# EAGLE board miniledcube (EAGLE 5.11)
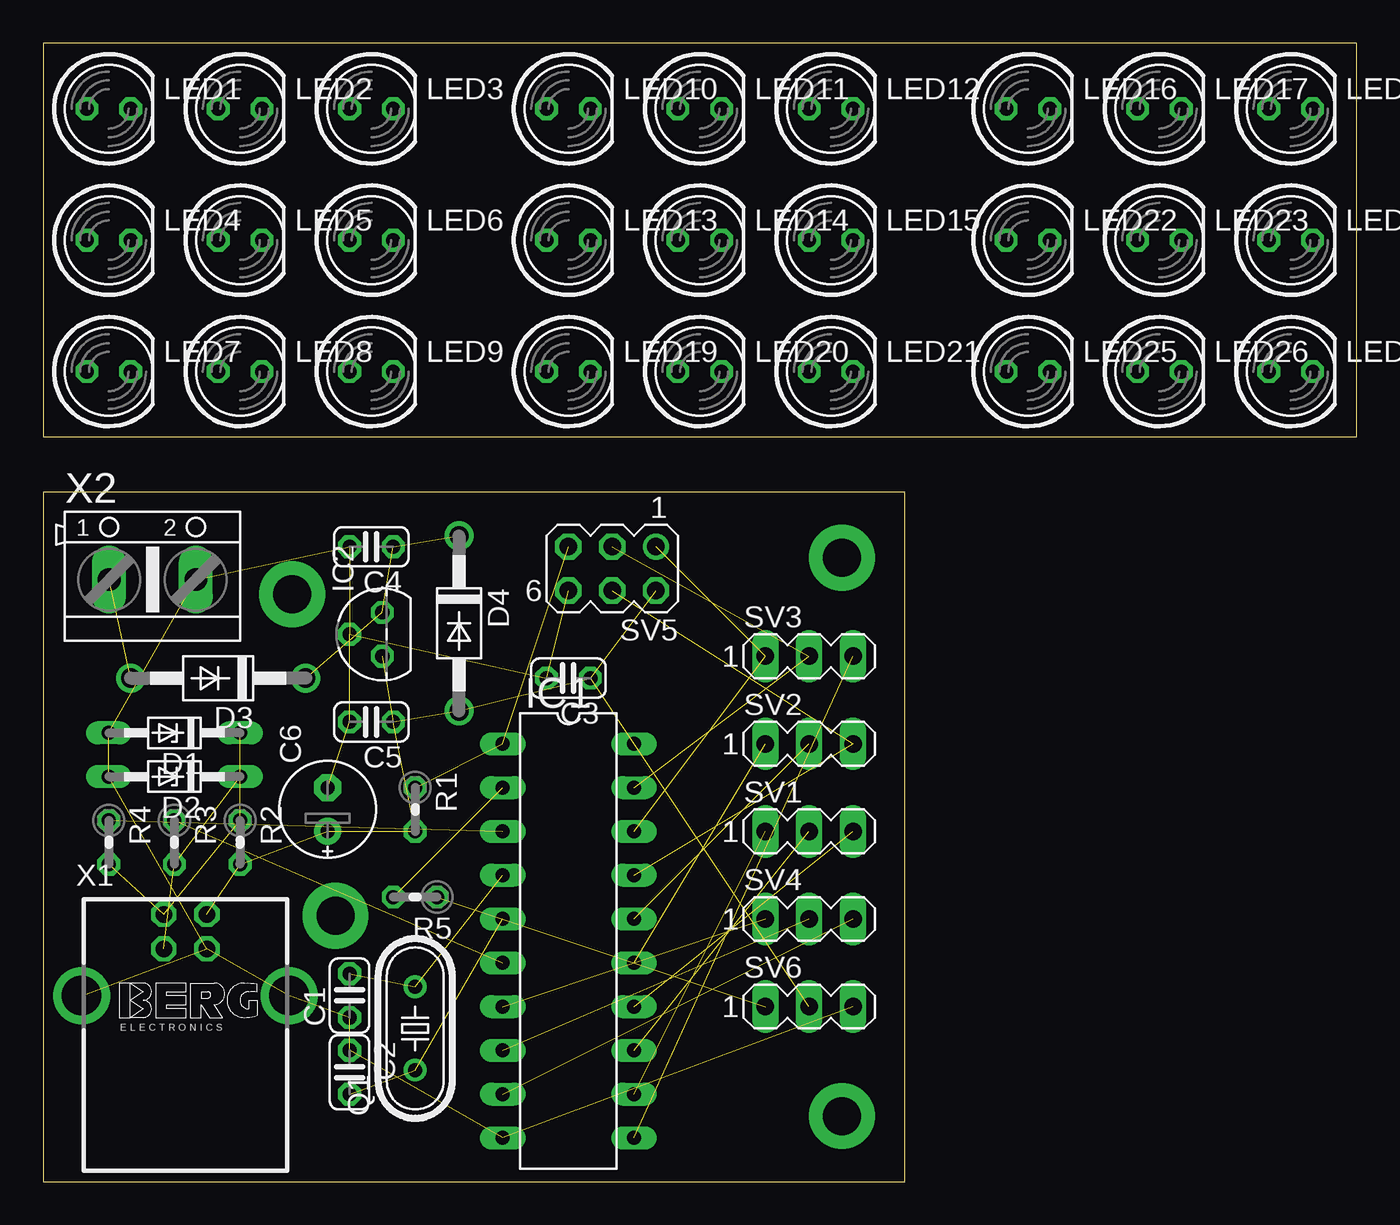
[diagram p0: board, top side]
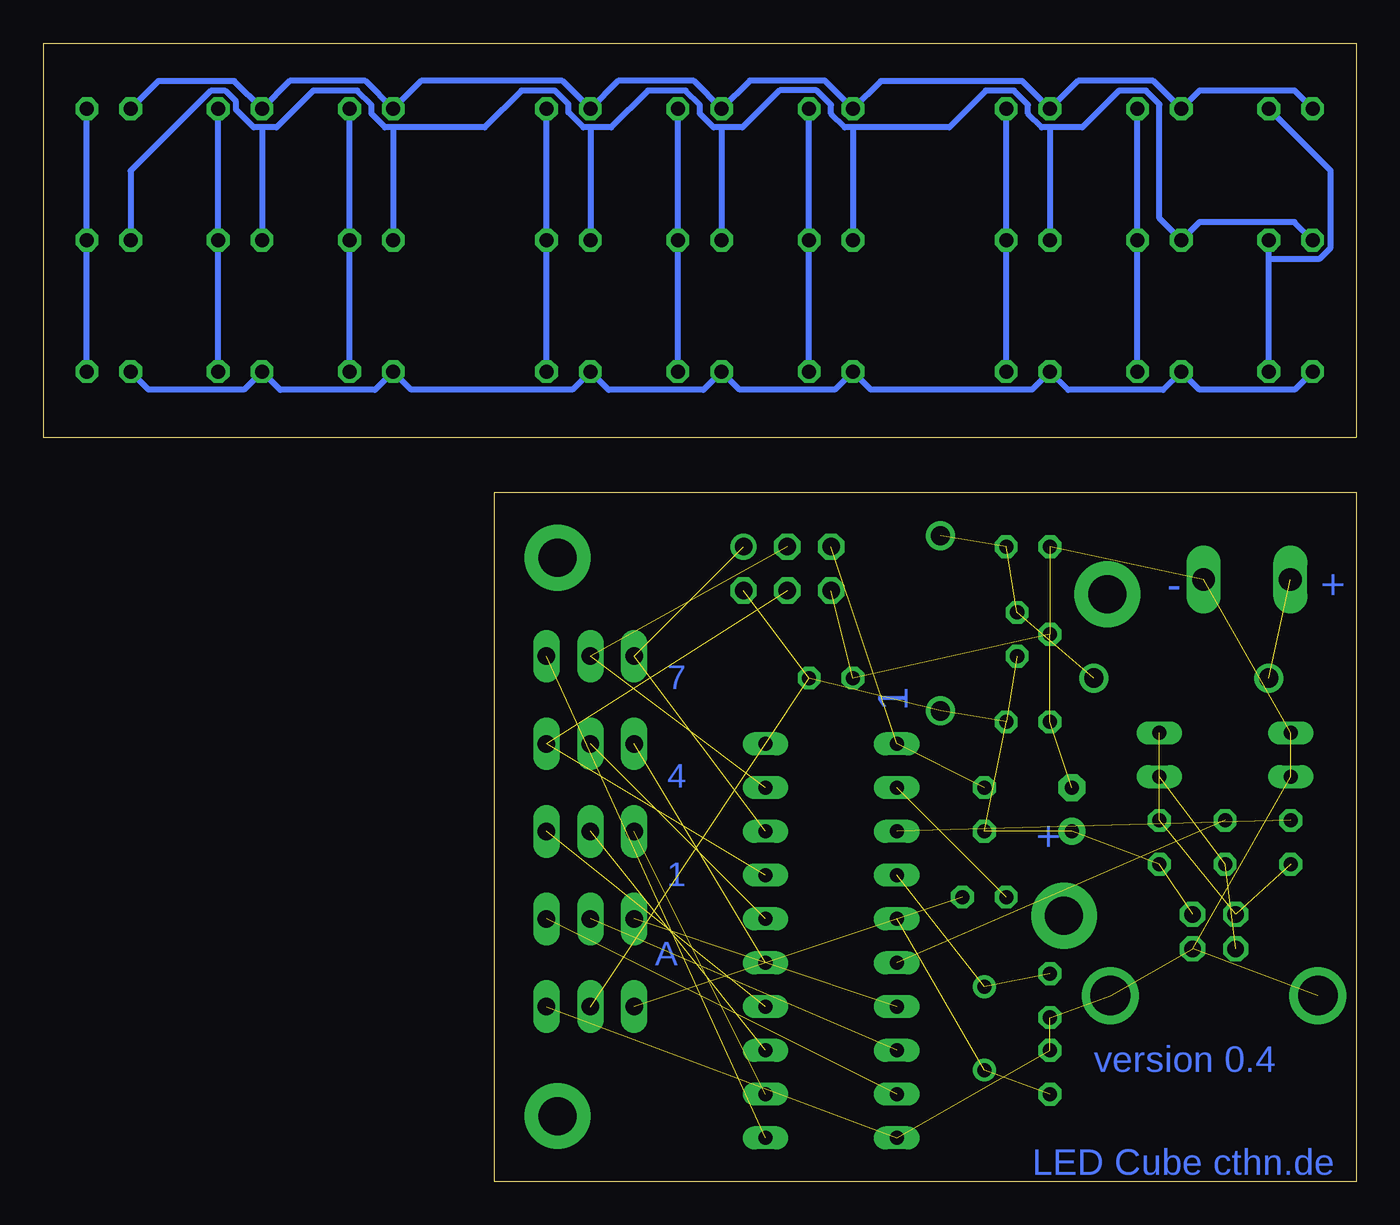
[diagram p1: board, bottom side, seen from below]

Size 76.2 x 66.04 mm. Coordinates in mm from the lower left corner, seen from the top.
Outline: 0,0 50,0 50,40 0,40 0,0
Outline: 76.2,66.04 0,66.04 0,43.18 76.2,43.18 76.2,66.04
Copper layers (1*16): Top 0.035mm / dielectric 1.5mm / Bottom 0.035mm
Design rules "default *": minimum track width 14mil, minimum drill 24mil, track to track 8mil, track to pad 8mil, pad to pad 8mil, via to via 8mil, smd to smd 8mil, copper to edge 40mil, drill to drill 8mil, minimum pad ring 10mil, minimum via ring 8mil, stop-mask expansion 4mil, vias tented up to drill 0mil, thermal gap 10mil

## Footprints (pad centres in the part's own frame; a part is rotated, then mirrored left to right if it is on the bottom)
C025-024X044 = drill 0.813 octagon: 1 -1.27,0; 2 1.27,0
E2,5-6E = drill 0.813 pad 1.575 round: + -1.27,0 | drill 0.813 pad 1.575 octagon: - 1.27,0
DO34Z7 = drill 0.813 long: A 3.81,0; C -3.81,0
DO41-10 = drill 1.118 round: A 5.08,0; C -5.08,0
DIL20 = drill 0.813 long: 1 -11.43,-3.81; 2 -8.89,-3.81; 3 -6.35,-3.81; 4 -3.81,-3.81; 5 -1.27,-3.81; 6 1.27,-3.81; 7 3.81,-3.81; 8 6.35,-3.81; 9 8.89,-3.81; 10 11.43,-3.81; 11 11.43,3.81; 12 8.89,3.81; 13 6.35,3.81; 14 3.81,3.81; 15 1.27,3.81; 16 -1.27,3.81; 17 -3.81,3.81; 18 -6.35,3.81; 19 -8.89,3.81; 20 -11.43,3.81
TO92 = drill 0.813 octagon: 1 -1.27,0; 2 0,1.905; 3 1.27,0
LED5MM = drill 0.813 octagon: A -1.27,0; K 1.27,0
HC49/S = drill 0.813 round: 1 -2.413,0; 2 2.413,0
0204V = drill 0.813 octagon: 1 -1.27,0; 2 1.27,0
MA03-1 = drill 1.016 long: 1 -2.54,0; 2 0,0; 3 2.54,0
MA03-2 = drill 1.016 round: 1 -2.54,-1.27 | drill 1.016 octagon: 2 -2.54,1.27; 3 0,-1.27; 4 0,1.27; 5 2.54,-1.27; 6 2.54,1.27
PN61729-S = drill 0.95 octagon: 1 1.25,4.71; 2 -1.25,4.71; 3 -1.25,2.71; 4 1.25,2.71 | drill 2.3 pad 2.9 round: S1 -6.02,0; S2 6.02,0
AK500/2 = drill 1.321 long: 1 -2.515,0; 2 2.515,0

## Placement (x,y rotation side)
C1  27p  [C025-024X044]  17.78,10.79 90 top
C2  27p  [C025-024X044]  17.78,6.35 270 top
C3  100n  [C025-024X044]  30.48,29.21 180 top
C4  100n  [C025-024X044]  19.05,36.83 180 top
C5  100n  [C025-024X044]  19.05,26.67 180 top
C6  4µ7  [E2,5-6E]  16.51,21.59 90 top
D1  3V6  [DO34Z7]  7.62,26.04 180 top
D2  3V6  [DO34Z7]  7.62,23.5 180 top
D3  1n4148  [DO41-10]  10.16,29.21 180 top
D4  1n4148  [DO41-10]  24.13,32.38 270 top
IC1  ATTINY2313V-10P  [DIL20]  30.48,13.97 270 top
IC2  78L05  [TO92]  19.68,31.75 90 top
LED1  [LED5MM]  3.81,62.23 0 top
LED2  [LED5MM]  11.43,62.23 0 top
LED3  [LED5MM]  19.05,62.23 0 top
LED4  [LED5MM]  3.81,54.61 0 top
LED5  [LED5MM]  11.43,54.61 0 top
LED6  [LED5MM]  19.05,54.61 0 top
LED7  [LED5MM]  3.81,46.99 0 top
LED8  [LED5MM]  11.43,46.99 0 top
LED9  [LED5MM]  19.05,46.99 0 top
LED10  [LED5MM]  30.48,62.23 0 top
LED11  [LED5MM]  38.1,62.23 0 top
LED12  [LED5MM]  45.72,62.23 0 top
LED13  [LED5MM]  30.48,54.61 0 top
LED14  [LED5MM]  38.1,54.61 0 top
LED15  [LED5MM]  45.72,54.61 0 top
LED16  [LED5MM]  57.15,62.23 0 top
LED17  [LED5MM]  64.77,62.23 0 top
LED18  [LED5MM]  72.39,62.23 0 top
LED19  [LED5MM]  30.48,46.99 0 top
LED20  [LED5MM]  38.1,46.99 0 top
LED21  [LED5MM]  45.72,46.99 0 top
LED22  [LED5MM]  57.15,54.61 0 top
LED23  [LED5MM]  64.77,54.61 0 top
LED24  [LED5MM]  72.39,54.61 0 top
LED25  [LED5MM]  57.15,46.99 0 top
LED26  [LED5MM]  64.77,46.99 0 top
LED27  [LED5MM]  72.39,46.99 0 top
Q1  [HC49/S]  21.59,8.89 90 top
R1  10k  [0204V]  21.59,21.59 270 top
R2  1k5  [0204V]  11.43,19.68 270 top
R3  69  [0204V]  7.62,19.68 270 top
R4  69  [0204V]  3.81,19.68 270 top
R5  1M5  [0204V]  21.59,16.51 180 top
SV1  [MA03-1]  44.45,20.32 0 top
SV2  [MA03-1]  44.45,25.4 0 top
SV3  [MA03-1]  44.45,30.48 0 top
SV4  [MA03-1]  44.45,15.24 0 top
SV5  ISP  [MA03-2]  33.02,35.56 180 top
SV6  [MA03-1]  44.45,10.16 0 top
X1  USB  [PN61729-S]  8.26,10.79 0 top
X2  [AK500/2]  6.35,34.92 0 top

## Library data of the parts
C1-C6 R1-R5 = rcl
D1-D4 = diode
IC1 = avr
IC2 = linear
LED1-LED27 = led
Q1 = crystal
SV1-SV6 = con-lstb; OC_FARNELL: unknown; OC_NEWARK: unknown
X1 = con-berg; OC_FARNELL: unknown; OC_NEWARK: unknown
X2 = con-ptr500; OC_FARNELL: unknown; OC_NEWARK: unknown

## Nets
1: IC1.12 SV1.1
1_: LED1.K LED4.K LED7.K
2: IC1.13 SV1.2
2_: LED2.K LED5.K LED8.K
3: IC1.14 SV1.3
3_: LED3.K LED6.K LED9.K
4: IC1.15 SV2.1
4_: LED16.K LED22.K LED25.K
5: IC1.16 SV2.2
5_: LED17.K LED23.K LED26.K
6_MOSI: IC1.17 SV2.3 SV5.4
6_MOSI_: LED18.K LED24.K LED27.K
7_MISO: IC1.18 SV3.1 SV5.1
7_MISO_: LED10.K LED13.K LED19.K
8_SCK: IC1.19 SV3.2 SV5.3
8_SCK_: LED11.K LED14.K LED20.K
9: IC1.11 SV3.3
9_: LED12.K LED15.K LED21.K
+5V: C3.1 C5.1 C6.+ D4.A IC1.20 IC2.1 R1.2 R2.2 SV5.2 SV6.2 X1.1
A: IC1.7 SV4.1
A_: LED7.A LED8.A LED9.A LED19.A LED20.A LED21.A LED25.A LED26.A LED27.A
B: IC1.8 SV4.2
B_: LED4.A LED5.A LED6.A LED13.A LED14.A LED15.A LED22.A LED23.A LED24.A
C: IC1.9 SV4.3
C_: LED1.A LED2.A LED3.A LED10.A LED11.A LED12.A LED16.A LED17.A LED18.A
D+: D2.C R3.2 X1.3
D-: D1.C R2.1 R4.2 X1.2
GND: C1.1 C2.1 C3.2 C4.2 C5.2 C6.- D1.A D2.A IC1.10 IC2.2 SV5.6 SV6.3 X1.4 X1.S1 X1.S2 X2.2
N$1: C1.2 IC1.4 Q1.2
N$2: C2.2 IC1.5 Q1.1
N$3: IC1.6 R3.1
N$4: IC1.3 R4.1
N$5: C4.1 D3.C D4.C IC2.3
N$10: R5.1 SV6.1
N$12: IC1.2 R5.2
RESET: IC1.1 R1.1 SV5.5
VCC: D3.A X2.1

## Tracks (layer width: path | path; a pad name or v marks a point on that pad's centre or on a via)
1  (1 unrouted)
1_
  Bottom 0.356: 5.08,53.55 2.12,53.55 1.49,54.18 1.49,58.64 LED1.K | LED7.K 5.08,53.55 | 5.08,53.55 LED4.K
2  (1 unrouted)
2_
  Bottom 0.356: LED8.K LED5.K LED2.K
3  (1 unrouted)
3_
  Bottom 0.356: LED3.K LED6.K LED9.K
4  (1 unrouted)
4_
  Bottom 0.356: LED16.K LED22.K LED25.K
5  (1 unrouted)
5_
  Bottom 0.356: LED17.K LED23.K LED26.K
6_MOSI  (2 unrouted)
6_MOSI_
  Bottom 0.356: LED27.K LED24.K LED18.K
7_MISO  (2 unrouted)
7_MISO_
  Bottom 0.356: LED19.K LED13.K LED10.K
8_SCK  (2 unrouted)
8_SCK_
  Bottom 0.356: LED20.K LED14.K LED11.K
9  (1 unrouted)
9_
  Bottom 0.356: LED12.K LED15.K LED21.K
+5V  (10 unrouted)
A  (1 unrouted)
A_
  Bottom 0.356: LED7.A 3.59,45.94 9.11,45.94 LED8.A 11.22,45.93 16.72,45.93 LED9.A 18.82,45.95 28.17,45.95 LED19.A 30.26,45.94 35.78,45.94 LED20.A 37.89,45.93 43.39,45.93 LED21.A 45.49,45.95 54.84,45.95 LED25.A 56.94,45.93 62.44,45.93 LED26.A 64.54,45.95 70.08,45.95 LED27.A
B  (1 unrouted)
B_
  Bottom 0.356: 44.45,61.15 43.24,61.15 41.11,63.28 38.92,63.28 38.1,62.46 38.1,61.96 37.29,61.15 36.83,61.15 | 55.88,61.16 50.58,61.16 48.45,63.29 46.51,63.29 45.72,62.5 45.72,62.02 44.85,61.15 44.45,61.15 | 44.45,61.15 LED15.A | 36.83,61.15 35.63,61.15 33.47,63.3 31.33,63.3 30.48,62.46 30.48,61.95 29.69,61.16 29.21,61.16 | 36.83,61.15 LED14.A | 63.5,61.15 62.66,61.15 60.53,63.28 57.98,63.28 57.15,62.46 57.15,61.95 56.36,61.16 55.88,61.16 | 55.88,61.16 LED22.A | LED24.A 71.12,58.62 66.47,63.27 65.61,63.27 65,62.66 65,62.18 63.97,61.15 63.5,61.15 | 63.5,61.15 LED23.A | 17.78,61.16 15.9,61.16 13.78,63.28 12.22,63.28 11.43,62.49 11.43,55.88 LED5.A 9.11,55.66 3.59,55.66 LED4.A | 29.21,61.16 23.62,61.16 21.5,63.28 19.87,63.28 19.05,62.46 19.05,61.95 18.26,61.16 17.78,61.16 | 17.78,61.16 LED6.A | 29.21,61.16 LED13.A
C  (1 unrouted)
C_
  Bottom 0.356: LED18.A 69.52,63.83 65.1,63.83 LED17.A 61.89,63.84 57.49,63.84 LED16.A 54.26,63.85 46.07,63.85 LED12.A 42.84,63.84 38.44,63.84 LED11.A 35.2,63.86 30.84,63.86 LED10.A 27.6,63.84 19.39,63.84 LED3.A 16.16,63.85 11.79,63.85 LED2.A 9.11,63.28 3.59,63.28 LED1.A
D+  (2 unrouted)
D-  (3 unrouted)
GND  (15 unrouted)
N$1  (2 unrouted)
N$2  (2 unrouted)
N$3  (1 unrouted)
N$4  (1 unrouted)
N$5  (3 unrouted)
N$7  (via drill 2.2 pad 3.81)
  other vias: 14.45,34.08
N$8  (via drill 2.2 pad 3.81)
  other vias: 46.35,36.2
N$9  (via drill 2.2 pad 3.81)
  other vias: 16.96,15.42
N$10  (1 unrouted)
N$12  (1 unrouted)
N$61  (via drill 2.2 pad 3.81)
  other vias: 46.35,3.81
RESET  (2 unrouted)
VCC  (1 unrouted)

## Text on the board
Bottom: + | - | 7 | 1 | 4 | + | 1 | A | version 0.4 | LED Cube cthn.de